# EAGLE board scheme to print (EAGLE 6.4)
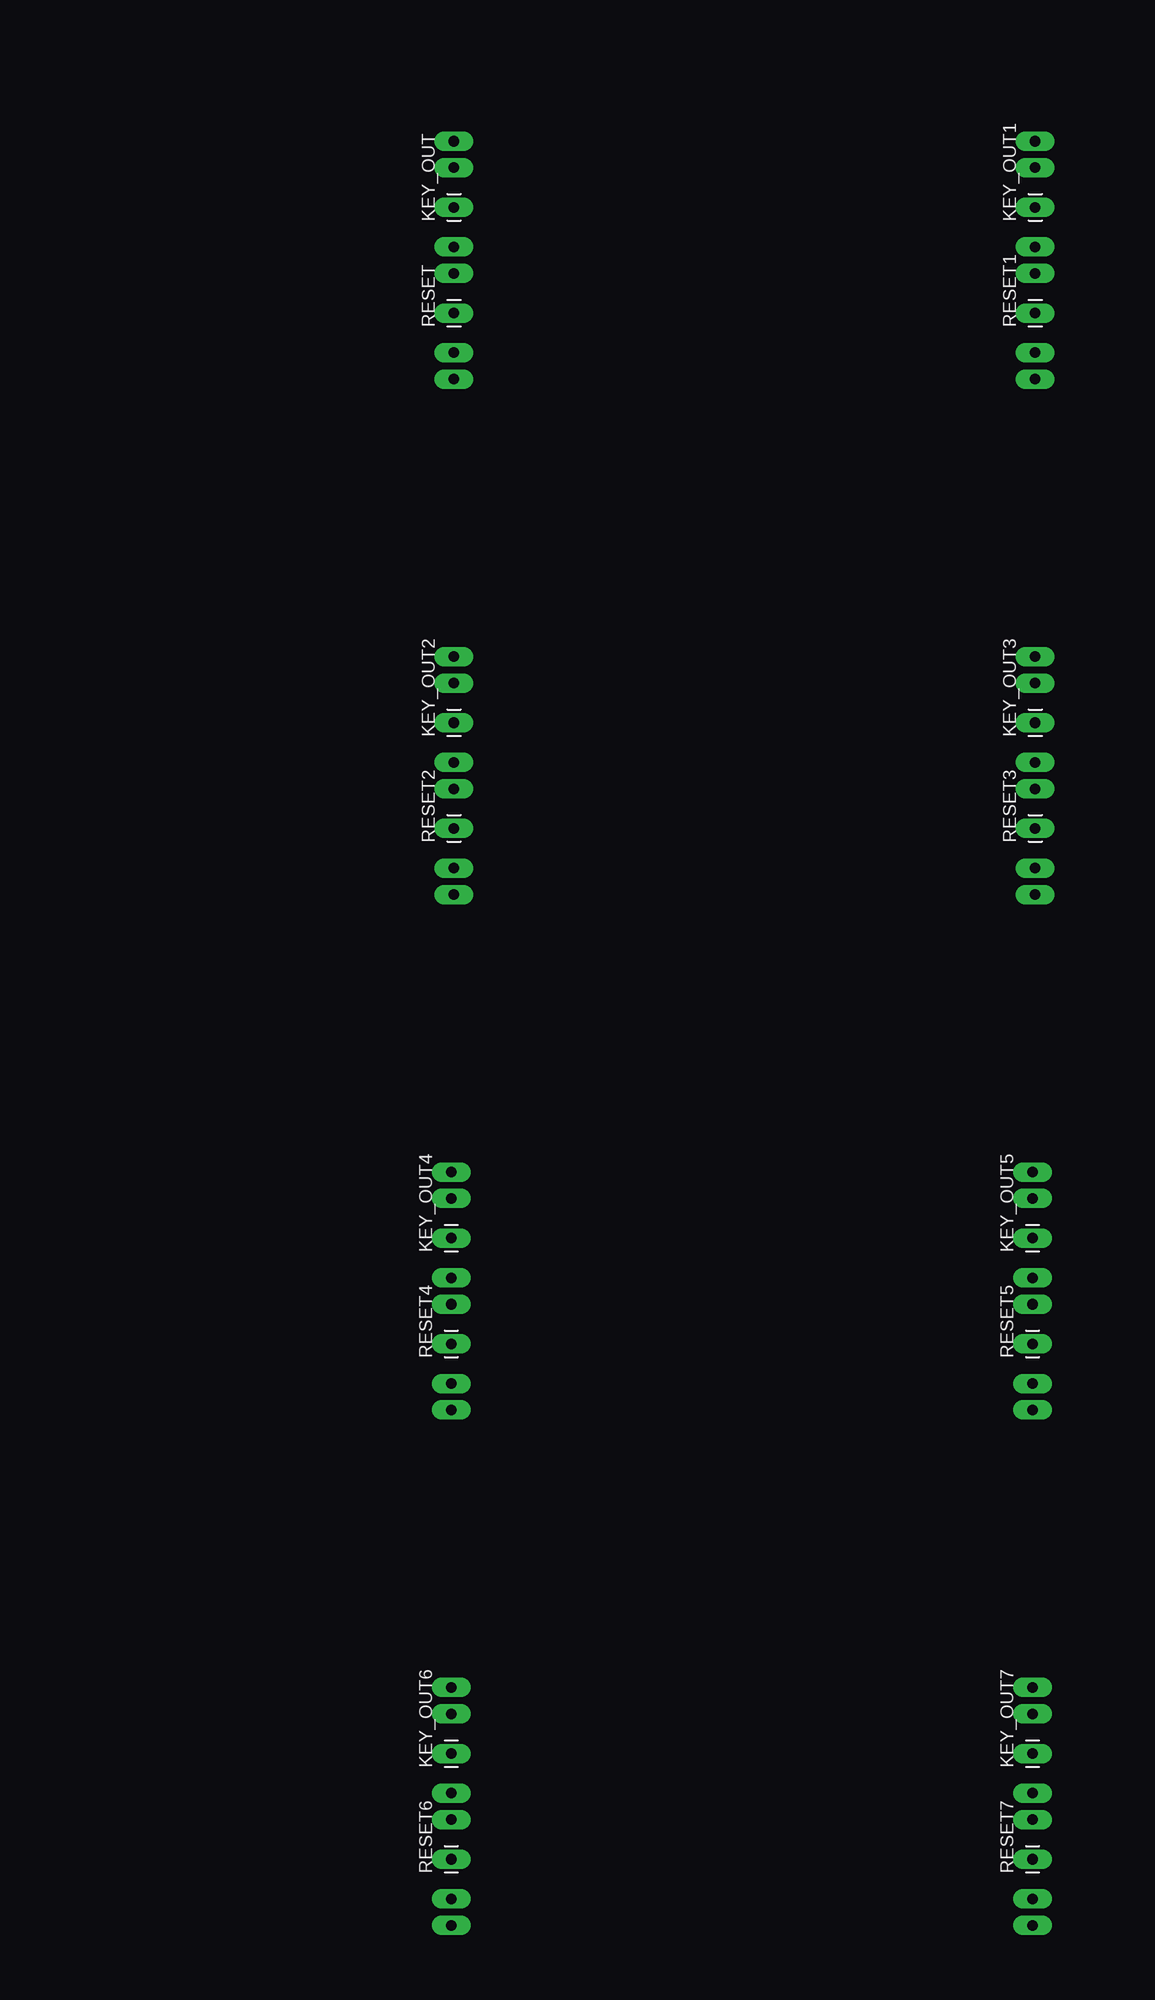
[diagram p0: board, top side]
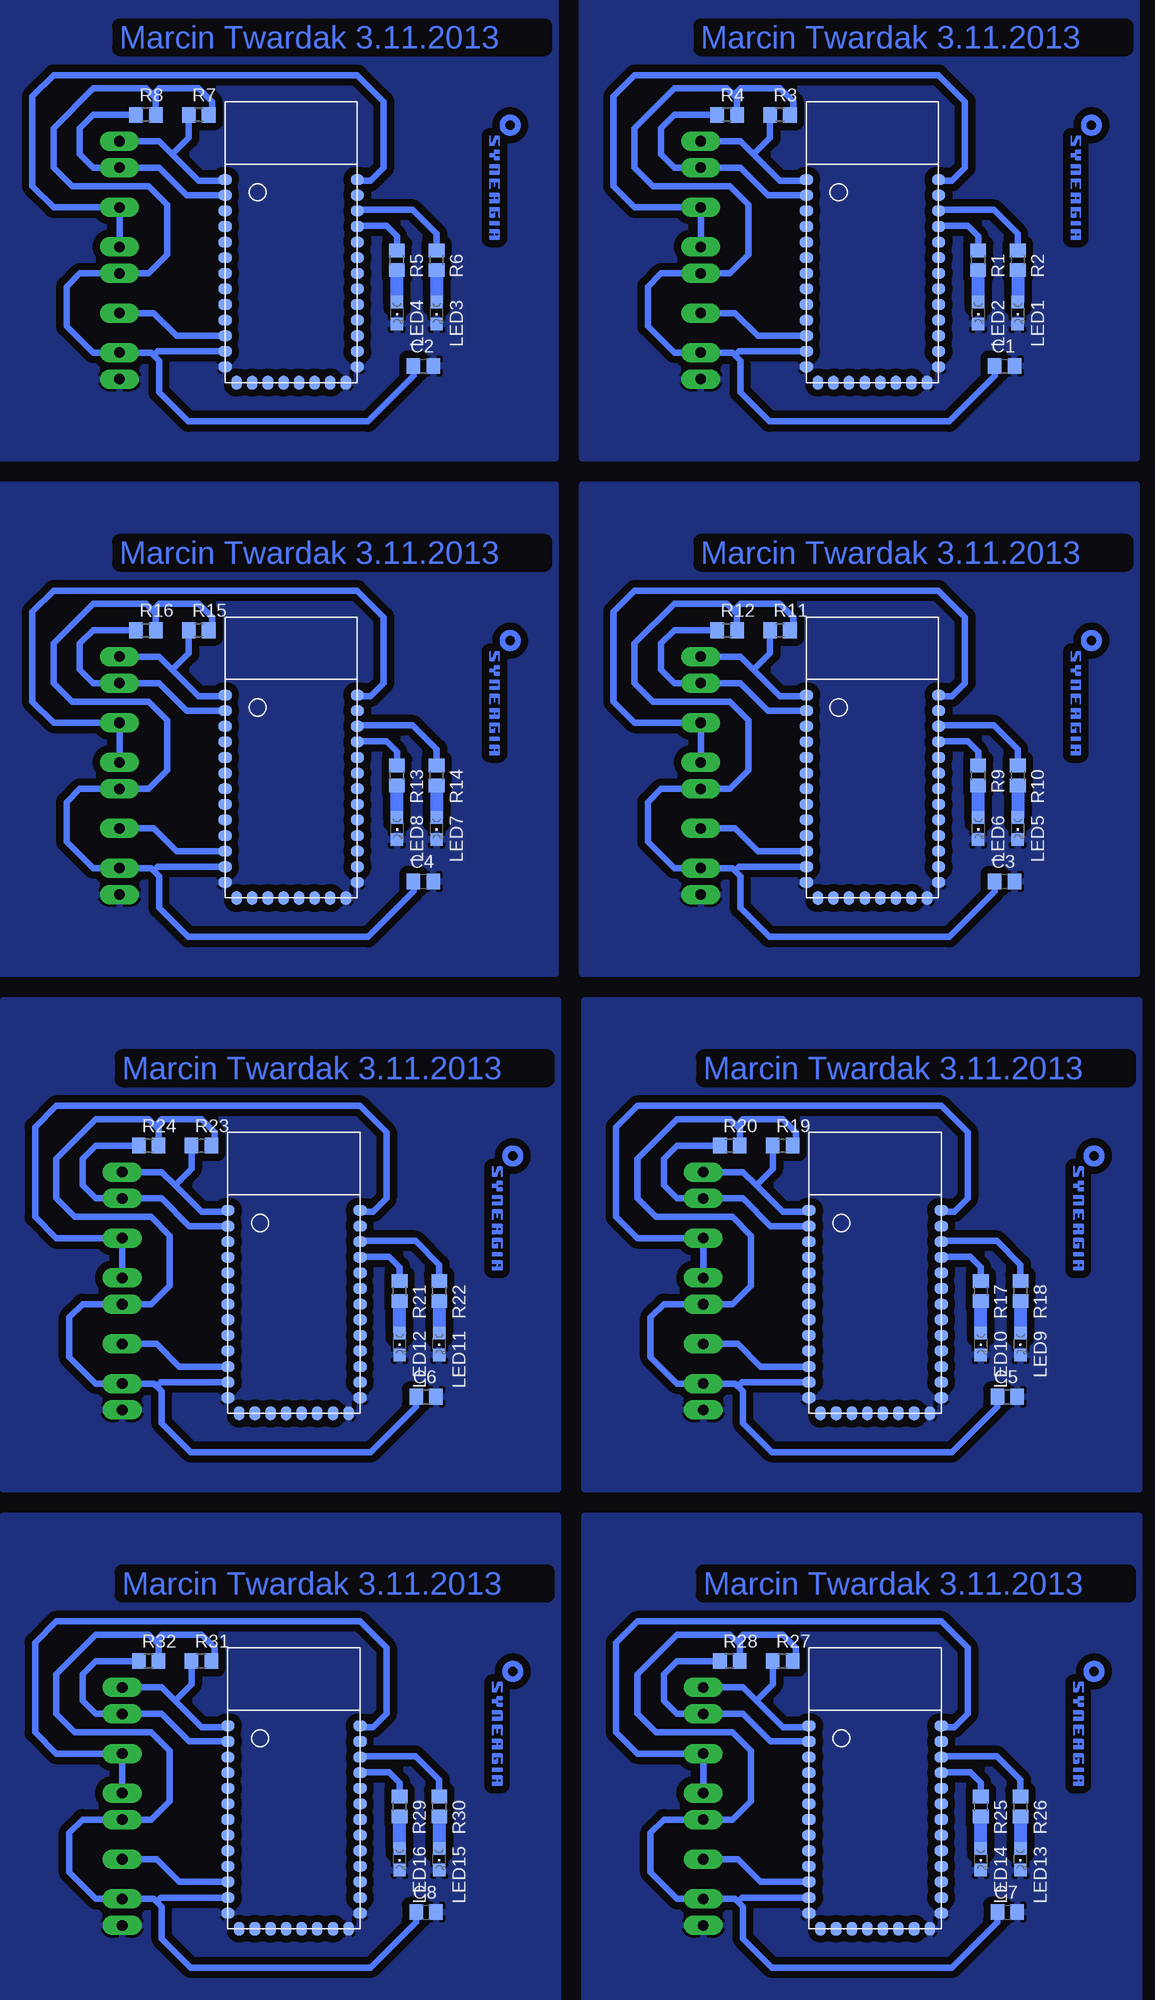
[diagram p1: board, bottom side, seen from below]

No outline drawn. Coordinates in mm, seen from the top.
Copper layers (1*16): Top 0.035mm / dielectric 1.5mm / Bottom 0.035mm
Design rules "default": minimum track width 10mil, minimum drill 24mil, track to track 8mil, track to pad 8mil, pad to pad 8mil, via to via 8mil, smd to smd 8mil, copper to edge 40mil, drill to drill 8mil, minimum pad ring 10mil, minimum via ring 8mil, stop-mask expansion 4mil, vias tented up to drill 0mil, thermal gap 10mil

## Footprints (pad centres in the part's own frame; a part is rotated, then mirrored left to right if it is on the bottom)
C0805 = smd 1.3 x 1.5: 1 -0.95,0; 2 0.95,0
HC-05 = smd 1.27 x 1: 3V3 0,-24; AIO0 0,-19.5; AIO1 0,-21; CTS 0,-10.5; GND@1 0,-25.5; GND@3 12.7,-25.5; PCM_CLK 0,-13.5; PCM_IN 0,-16.5; PCM_OUT 0,-15; PCM_SYNC 0,-18; PIO0 12.7,-24; PIO1 12.7,-22.5; PIO2 12.7,-21; PIO3 12.7,-19.5; PIO4 12.7,-18; PIO5 12.7,-16.5; PIO6 12.7,-15; PIO7 12.7,-13.5; PIO8(LED1) 12.7,-12; PIO9(LED2) 12.7,-10.5; PIO10 12.7,-9; PIO11(KEY) 12.7,-7.5; RESET 0,-22.5; RTS 0,-12; RX 0,-9; TX 0,-7.5 | smd 1 x 1.27: CLK 8.6,-27; CSB 4.1,-27; GND@2 11.6,-27; MISO 7.1,-27; MOSI 5.6,-27; NC 1.1,-27; USB_D+ 10.1,-27; USB_D- 2.6,-27
1X01_LONGPAD = drill 1.016 pad 1.88 long: 1 0,0
1X02_LONGPADS = drill 1.016 pad 1.88 long: 1 0,0; 2 2.54,0
CHIPLED_0805 = smd 1.2 x 1.2: A 0,-1.05; C 0,1.05
R0805 = smd 1.3 x 1.5: 1 -0.95,0; 2 0.95,0

## Placement (x,y rotation side)
C1  100n  [C0805]  12.7,41.91 0 bottom
C2  100n  [C0805]  68.58,41.91 0 bottom
C3  100n  [C0805]  12.7,-7.62 0 bottom
C4  100n  [C0805]  68.58,-7.62 0 bottom
C5  100n  [C0805]  12.45,-57.15 0 bottom
C6  100n  [C0805]  68.33,-57.15 0 bottom
C7  100n  [C0805]  12.45,-106.68 0 bottom
C8  100n  [C0805]  68.33,-106.68 0 bottom
IC1  [HC-05]  31.75,67.31 0 bottom
IC2  [HC-05]  87.63,67.31 0 bottom
IC3  [HC-05]  31.75,17.78 0 bottom
IC4  [HC-05]  87.63,17.78 0 bottom
IC5  [HC-05]  31.5,-31.75 0 bottom
IC6  [HC-05]  87.38,-31.75 0 bottom
IC7  [HC-05]  31.5,-81.28 0 bottom
IC8  [HC-05]  87.38,-81.28 0 bottom
KEY_OUT  M01PTH_LONGPAD  [1X01_LONGPAD]  41.91,57.15 90 top
KEY_OUT1  M01PTH_LONGPAD  [1X01_LONGPAD]  97.79,57.15 90 top
KEY_OUT2  M01PTH_LONGPAD  [1X01_LONGPAD]  41.91,7.62 90 top
KEY_OUT3  M01PTH_LONGPAD  [1X01_LONGPAD]  97.79,7.62 90 top
KEY_OUT4  M01PTH_LONGPAD  [1X01_LONGPAD]  41.66,-41.91 90 top
KEY_OUT5  M01PTH_LONGPAD  [1X01_LONGPAD]  97.54,-41.91 90 top
KEY_OUT6  M01PTH_LONGPAD  [1X01_LONGPAD]  41.66,-91.44 90 top
KEY_OUT7  M01PTH_LONGPAD  [1X01_LONGPAD]  97.54,-91.44 90 top
KEY_ZWORKA  [1X02_LONGPADS]  41.91,50.8 90 top
KEY_ZWORKA1  [1X02_LONGPADS]  97.79,50.8 90 top
KEY_ZWORKA2  [1X02_LONGPADS]  41.91,1.27 90 top
KEY_ZWORKA3  [1X02_LONGPADS]  97.79,1.27 90 top
KEY_ZWORKA4  [1X02_LONGPADS]  41.66,-48.26 90 top
KEY_ZWORKA5  [1X02_LONGPADS]  97.54,-48.26 90 top
KEY_ZWORKA6  [1X02_LONGPADS]  41.66,-97.79 90 top
KEY_ZWORKA7  [1X02_LONGPADS]  97.54,-97.79 90 top
LED1  RED  [CHIPLED_0805]  11.43,46.99 180 bottom
LED2  GREEN  [CHIPLED_0805]  15.24,46.99 180 bottom
LED3  RED  [CHIPLED_0805]  67.31,46.99 180 bottom
LED4  GREEN  [CHIPLED_0805]  71.12,46.99 180 bottom
LED5  RED  [CHIPLED_0805]  11.43,-2.54 180 bottom
LED6  GREEN  [CHIPLED_0805]  15.24,-2.54 180 bottom
LED7  RED  [CHIPLED_0805]  67.31,-2.54 180 bottom
LED8  GREEN  [CHIPLED_0805]  71.12,-2.54 180 bottom
LED9  RED  [CHIPLED_0805]  11.18,-52.07 180 bottom
LED10  GREEN  [CHIPLED_0805]  14.99,-52.07 180 bottom
LED11  RED  [CHIPLED_0805]  67.06,-52.07 180 bottom
LED12  GREEN  [CHIPLED_0805]  70.87,-52.07 180 bottom
LED13  RED  [CHIPLED_0805]  11.18,-101.6 180 bottom
LED14  GREEN  [CHIPLED_0805]  14.99,-101.6 180 bottom
LED15  RED  [CHIPLED_0805]  67.06,-101.6 180 bottom
LED16  GREEN  [CHIPLED_0805]  70.87,-101.6 180 bottom
R1  470  [R0805]  15.24,52.07 270 bottom
R2  470  [R0805]  11.43,52.07 270 bottom
R3  10k  [R0805]  34.29,66.04 0 bottom
R4  10k  [R0805]  39.37,66.04 0 bottom
R5  470  [R0805]  71.12,52.07 270 bottom
R6  470  [R0805]  67.31,52.07 270 bottom
R7  10k  [R0805]  90.17,66.04 0 bottom
R8  10k  [R0805]  95.25,66.04 0 bottom
R9  470  [R0805]  15.24,2.54 270 bottom
R10  470  [R0805]  11.43,2.54 270 bottom
R11  10k  [R0805]  34.29,16.51 0 bottom
R12  10k  [R0805]  39.37,16.51 0 bottom
R13  470  [R0805]  71.12,2.54 270 bottom
R14  470  [R0805]  67.31,2.54 270 bottom
R15  10k  [R0805]  90.17,16.51 0 bottom
R16  10k  [R0805]  95.25,16.51 0 bottom
R17  470  [R0805]  14.99,-46.99 270 bottom
R18  470  [R0805]  11.18,-46.99 270 bottom
R19  10k  [R0805]  34.04,-33.02 0 bottom
R20  10k  [R0805]  39.12,-33.02 0 bottom
R21  470  [R0805]  70.87,-46.99 270 bottom
R22  470  [R0805]  67.06,-46.99 270 bottom
R23  10k  [R0805]  89.92,-33.02 0 bottom
R24  10k  [R0805]  95,-33.02 0 bottom
R25  470  [R0805]  14.99,-96.52 270 bottom
R26  470  [R0805]  11.18,-96.52 270 bottom
R27  10k  [R0805]  34.04,-82.55 0 bottom
R28  10k  [R0805]  39.12,-82.55 0 bottom
R29  470  [R0805]  70.87,-96.52 270 bottom
R30  470  [R0805]  67.06,-96.52 270 bottom
R31  10k  [R0805]  89.92,-82.55 0 bottom
R32  10k  [R0805]  95,-82.55 0 bottom
RESET  M01PTH_LONGPAD  [1X01_LONGPAD]  41.91,46.99 90 top
RESET1  M01PTH_LONGPAD  [1X01_LONGPAD]  97.79,46.99 90 top
RESET2  M01PTH_LONGPAD  [1X01_LONGPAD]  41.91,-2.54 90 top
RESET3  M01PTH_LONGPAD  [1X01_LONGPAD]  97.79,-2.54 90 top
RESET4  M01PTH_LONGPAD  [1X01_LONGPAD]  41.66,-52.07 90 top
RESET5  M01PTH_LONGPAD  [1X01_LONGPAD]  97.54,-52.07 90 top
RESET6  M01PTH_LONGPAD  [1X01_LONGPAD]  41.66,-101.6 90 top
RESET7  M01PTH_LONGPAD  [1X01_LONGPAD]  97.54,-101.6 90 top
RX/TX  [1X02_LONGPADS]  41.91,60.96 90 top
RX/TX1  [1X02_LONGPADS]  97.79,60.96 90 top
RX/TX2  [1X02_LONGPADS]  41.91,11.43 90 top
RX/TX3  [1X02_LONGPADS]  97.79,11.43 90 top
RX/TX4  [1X02_LONGPADS]  41.66,-38.1 90 top
RX/TX5  [1X02_LONGPADS]  97.54,-38.1 90 top
RX/TX6  [1X02_LONGPADS]  41.66,-87.63 90 top
RX/TX7  [1X02_LONGPADS]  97.54,-87.63 90 top
SUPPLY  [1X02_LONGPADS]  41.91,43.18 270 top
SUPPLY1  [1X02_LONGPADS]  97.79,43.18 270 top
SUPPLY2  [1X02_LONGPADS]  41.91,-6.35 270 top
SUPPLY3  [1X02_LONGPADS]  97.79,-6.35 270 top
SUPPLY4  [1X02_LONGPADS]  41.66,-55.88 270 top
SUPPLY5  [1X02_LONGPADS]  97.54,-55.88 270 top
SUPPLY6  [1X02_LONGPADS]  41.66,-105.41 270 top
SUPPLY7  [1X02_LONGPADS]  97.54,-105.41 270 top
U$1  [SYNERGIA_12MM]  6.35,66.04 270 bottom
U$2  [SYNERGIA_12MM]  62.23,66.04 270 bottom
U$3  [SYNERGIA_12MM]  6.35,16.51 270 bottom
U$4  [SYNERGIA_12MM]  62.23,16.51 270 bottom
U$5  [SYNERGIA_12MM]  6.1,-33.02 270 bottom
U$6  [SYNERGIA_12MM]  61.98,-33.02 270 bottom
U$7  [SYNERGIA_12MM]  6.1,-82.55 270 bottom
U$8  [SYNERGIA_12MM]  61.98,-82.55 270 bottom

## Library data of the parts
C1-C8 R1-R32 = rcl
IC1-IC8 = HC-05
KEY_OUT KEY_OUT1-KEY_OUT7 KEY_ZWORKA KEY_ZWORKA1-KEY_ZWORKA7 RESET RESET1-RESET7 RX/TX RX/TX1-RX/TX7 SUPPLY SUPPLY1-SUPPLY7 = SparkFun
LED1-LED16 = led
U$1-U$8 = synergia_logo

## Nets
3.3V: C1.1 IC1.3V3 KEY_ZWORKA.1 R3.2 R4.2 SUPPLY.1
3.3V1: C2.1 IC2.3V3 KEY_ZWORKA1.1 R7.2 R8.2 SUPPLY1.1
3.3V2: C3.1 IC3.3V3 KEY_ZWORKA2.1 R11.2 R12.2 SUPPLY2.1
3.3V3: C4.1 IC4.3V3 KEY_ZWORKA3.1 R15.2 R16.2 SUPPLY3.1
3.3V4: C5.1 IC5.3V3 KEY_ZWORKA4.1 R19.2 R20.2 SUPPLY4.1
3.3V5: C6.1 IC6.3V3 KEY_ZWORKA5.1 R23.2 R24.2 SUPPLY5.1
3.3V6: C7.1 IC7.3V3 KEY_ZWORKA6.1 R27.2 R28.2 SUPPLY6.1
3.3V7: C8.1 IC8.3V3 KEY_ZWORKA7.1 R31.2 R32.2 SUPPLY7.1
GND: C1.2 IC1.GND@1 IC1.GND@2 IC1.GND@3 LED1.C LED2.C SUPPLY.2
GND1: C2.2 IC2.GND@1 IC2.GND@2 IC2.GND@3 LED3.C LED4.C SUPPLY1.2
GND2: C3.2 IC3.GND@1 IC3.GND@2 IC3.GND@3 LED5.C LED6.C SUPPLY2.2
GND3: C4.2 IC4.GND@1 IC4.GND@2 IC4.GND@3 LED7.C LED8.C SUPPLY3.2
GND4: C5.2 IC5.GND@1 IC5.GND@2 IC5.GND@3 LED9.C LED10.C SUPPLY4.2
GND5: C6.2 IC6.GND@1 IC6.GND@2 IC6.GND@3 LED11.C LED12.C SUPPLY5.2
GND6: C7.2 IC7.GND@1 IC7.GND@2 IC7.GND@3 LED13.C LED14.C SUPPLY6.2
GND7: C8.2 IC8.GND@1 IC8.GND@2 IC8.GND@3 LED15.C LED16.C SUPPLY7.2
N$1: IC1.PIO11(KEY) KEY_OUT.1 KEY_ZWORKA.2
N$2: IC1.PIO8(LED1) R1.1
N$3: IC1.PIO9(LED2) R2.1
N$4: LED2.A R1.2
N$5: LED1.A R2.2
N$6: IC1.RESET RESET.1
N$7: IC1.TX R3.1 RX/TX.2
N$8: IC1.RX R4.1 RX/TX.1
N$9: IC2.PIO11(KEY) KEY_OUT1.1 KEY_ZWORKA1.2
N$10: IC2.PIO8(LED1) R5.1
N$11: IC2.PIO9(LED2) R6.1
N$12: LED3.A R6.2
N$13: LED4.A R5.2
N$14: IC2.TX R7.1 RX/TX1.2
N$15: IC2.RX R8.1 RX/TX1.1
N$16: IC2.RESET RESET1.1
N$17: IC3.PIO11(KEY) KEY_OUT2.1 KEY_ZWORKA2.2
N$18: IC3.PIO8(LED1) R9.1
N$19: IC3.PIO9(LED2) R10.1
N$20: LED5.A R10.2
N$21: LED6.A R9.2
N$22: IC3.TX R11.1 RX/TX2.2
N$23: IC3.RX R12.1 RX/TX2.1
N$24: IC3.RESET RESET2.1
N$25: IC4.PIO11(KEY) KEY_OUT3.1 KEY_ZWORKA3.2
N$26: IC4.PIO8(LED1) R13.1
N$27: IC4.PIO9(LED2) R14.1
N$28: LED7.A R14.2
N$29: LED8.A R13.2
N$30: IC4.TX R15.1 RX/TX3.2
N$31: IC4.RX R16.1 RX/TX3.1
N$32: IC4.RESET RESET3.1
N$33: IC5.PIO11(KEY) KEY_OUT4.1 KEY_ZWORKA4.2
N$34: IC5.PIO8(LED1) R17.1
N$35: IC5.PIO9(LED2) R18.1
N$36: LED9.A R18.2
N$37: LED10.A R17.2
N$38: IC5.TX R19.1 RX/TX4.2
N$39: IC5.RX R20.1 RX/TX4.1
N$40: IC5.RESET RESET4.1
N$41: IC6.PIO11(KEY) KEY_OUT5.1 KEY_ZWORKA5.2
N$42: IC6.PIO8(LED1) R21.1
N$43: IC6.PIO9(LED2) R22.1
N$44: LED11.A R22.2
N$45: LED12.A R21.2
N$46: IC6.TX R23.1 RX/TX5.2
N$47: IC6.RX R24.1 RX/TX5.1
N$48: IC6.RESET RESET5.1
N$49: IC7.PIO11(KEY) KEY_OUT6.1 KEY_ZWORKA6.2
N$50: IC7.PIO8(LED1) R25.1
N$51: IC7.PIO9(LED2) R26.1
N$52: LED13.A R26.2
N$53: LED14.A R25.2
N$54: IC7.TX R27.1 RX/TX6.2
N$55: IC7.RX R28.1 RX/TX6.1
N$56: IC7.RESET RESET6.1
N$57: IC8.PIO11(KEY) KEY_OUT7.1 KEY_ZWORKA7.2
N$58: IC8.PIO8(LED1) R29.1
N$59: IC8.PIO9(LED2) R30.1
N$60: LED15.A R30.2
N$61: LED16.A R29.2
N$62: IC8.TX R31.1 RX/TX7.2
N$63: IC8.RX R32.1 RX/TX7.1
N$64: IC8.RESET RESET7.1

## Tracks (layer width: path | path; a pad name or v marks a point on that pad's centre or on a via)
3.3V
  Bottom 0.61: C1.1 13.65,40.96 18.03,36.58 35.31,36.58 38.1,39.37 38.1,42.42 38.61,42.93 | 38.61,42.93 38.86,43.18 SUPPLY.1 44.45,43.18 46.99,45.72 46.99,49.53 45.72,50.8 KEY_ZWORKA.1 39.12,50.8 37.34,52.58 37.34,57.4 39.12,59.18 46.48,59.18 48.26,60.96 48.26,64.77 44.45,68.58 39.37,68.58 38.42,67.63 | IC1.3V3 38.22,43.31 38.61,42.93 | R3.2 33.02,66.36 33.02,67.31 34.29,68.58 38.1,68.58 38.42,68.26 38.42,67.63 | R4.2 38.42,67.63
3.3V1
  Bottom 0.61: C2.1 69.53,40.96 73.91,36.58 91.19,36.58 93.98,39.37 93.98,42.42 94.49,42.93 | 94.49,42.93 94.74,43.18 SUPPLY1.1 100.33,43.18 102.87,45.72 102.87,49.53 101.6,50.8 KEY_ZWORKA1.1 95,50.8 93.22,52.58 93.22,57.4 95,59.18 102.36,59.18 104.14,60.96 104.14,64.77 100.33,68.58 95.25,68.58 94.3,67.63 | IC2.3V3 94.1,43.31 94.49,42.93 | R7.2 88.9,66.36 88.9,67.31 90.17,68.58 93.98,68.58 94.3,68.26 94.3,67.63 | R8.2 94.3,67.63
3.3V2
  Bottom 0.61: C3.1 13.65,-8.57 18.03,-12.95 35.31,-12.95 38.1,-10.16 38.1,-7.11 38.61,-6.6 | 38.61,-6.6 38.86,-6.35 SUPPLY2.1 44.45,-6.35 46.99,-3.81 46.99,0 45.72,1.27 KEY_ZWORKA2.1 39.12,1.27 37.34,3.05 37.34,7.87 39.12,9.65 46.48,9.65 48.26,11.43 48.26,15.24 44.45,19.05 39.37,19.05 38.42,18.1 | IC3.3V3 38.22,-6.22 38.61,-6.6 | R11.2 33.02,16.83 33.02,17.78 34.29,19.05 38.1,19.05 38.42,18.73 38.42,18.1 | R12.2 38.42,18.1
3.3V3
  Bottom 0.61: C4.1 69.53,-8.57 73.91,-12.95 91.19,-12.95 93.98,-10.16 93.98,-7.11 94.49,-6.6 | 94.49,-6.6 94.74,-6.35 SUPPLY3.1 100.33,-6.35 102.87,-3.81 102.87,0 101.6,1.27 KEY_ZWORKA3.1 95,1.27 93.22,3.05 93.22,7.87 95,9.65 102.36,9.65 104.14,11.43 104.14,15.24 100.33,19.05 95.25,19.05 94.3,18.1 | IC4.3V3 94.1,-6.22 94.49,-6.6 | R15.2 88.9,16.83 88.9,17.78 90.17,19.05 93.98,19.05 94.3,18.73 94.3,18.1 | R16.2 94.3,18.1
3.3V4
  Bottom 0.61: C5.1 13.4,-58.1 17.78,-62.48 35.05,-62.48 37.85,-59.69 37.85,-56.64 38.35,-56.13 | 38.35,-56.13 38.61,-55.88 SUPPLY4.1 44.2,-55.88 46.74,-53.34 46.74,-49.53 45.47,-48.26 KEY_ZWORKA4.1 38.86,-48.26 37.08,-46.48 37.08,-41.66 38.86,-39.88 46.23,-39.88 48.01,-38.1 48.01,-34.29 44.2,-30.48 39.12,-30.48 38.17,-31.43 | IC5.3V3 37.97,-55.75 38.35,-56.13 | R19.2 32.77,-32.7 32.77,-31.75 34.04,-30.48 37.85,-30.48 38.17,-30.8 38.17,-31.43 | R20.2 38.17,-31.43
3.3V5
  Bottom 0.61: C6.1 69.28,-58.1 73.66,-62.48 90.93,-62.48 93.73,-59.69 93.73,-56.64 94.23,-56.13 | 94.23,-56.13 94.49,-55.88 SUPPLY5.1 100.08,-55.88 102.62,-53.34 102.62,-49.53 101.35,-48.26 KEY_ZWORKA5.1 94.74,-48.26 92.96,-46.48 92.96,-41.66 94.74,-39.88 102.11,-39.88 103.89,-38.1 103.89,-34.29 100.08,-30.48 95,-30.48 94.05,-31.43 | IC6.3V3 93.85,-55.75 94.23,-56.13 | R23.2 88.65,-32.7 88.65,-31.75 89.92,-30.48 93.73,-30.48 94.05,-30.8 94.05,-31.43 | R24.2 94.05,-31.43
3.3V6
  Bottom 0.61: C7.1 13.4,-107.63 17.78,-112.01 35.05,-112.01 37.85,-109.22 37.85,-106.17 38.35,-105.66 | 38.35,-105.66 38.61,-105.41 SUPPLY6.1 44.2,-105.41 46.74,-102.87 46.74,-99.06 45.47,-97.79 KEY_ZWORKA6.1 38.86,-97.79 37.08,-96.01 37.08,-91.19 38.86,-89.41 46.23,-89.41 48.01,-87.63 48.01,-83.82 44.2,-80.01 39.12,-80.01 38.17,-80.96 | IC7.3V3 37.97,-105.28 38.35,-105.66 | R27.2 32.77,-82.23 32.77,-81.28 34.04,-80.01 37.85,-80.01 38.17,-80.33 38.17,-80.96 | R28.2 38.17,-80.96
3.3V7
  Bottom 0.61: C8.1 69.28,-107.63 73.66,-112.01 90.93,-112.01 93.73,-109.22 93.73,-106.17 94.23,-105.66 | 94.23,-105.66 94.49,-105.41 SUPPLY7.1 100.08,-105.41 102.62,-102.87 102.62,-99.06 101.35,-97.79 KEY_ZWORKA7.1 94.74,-97.79 92.96,-96.01 92.96,-91.19 94.74,-89.41 102.11,-89.41 103.89,-87.63 103.89,-83.82 100.08,-80.01 95,-80.01 94.05,-80.96 | IC8.3V3 93.85,-105.28 94.23,-105.66 | R31.2 88.65,-82.23 88.65,-81.28 89.92,-80.01 93.73,-80.01 94.05,-80.33 94.05,-80.96 | R32.2 94.05,-80.96
GND
  pour Bottom (isolate 0.711): 0,80.01 0,33.02 53.34,33.02 53.34,80.01
GND1
  pour Bottom (isolate 0.711): 55.88,80.01 55.88,33.02 109.22,33.02 109.22,80.01
GND2
  pour Bottom (isolate 0.711): 0,30.48 0,-16.51 53.34,-16.51 53.34,30.48
GND3
  pour Bottom (isolate 0.711): 55.88,30.48 55.88,-16.51 109.22,-16.51 109.22,30.48
GND4
  pour Bottom (isolate 0.711): -0.25,-19.05 -0.25,-66.04 53.09,-66.04 53.09,-19.05
GND5
  pour Bottom (isolate 0.711): 55.63,-19.05 55.63,-66.04 108.97,-66.04 108.97,-19.05
GND6
  pour Bottom (isolate 0.711): -0.25,-68.58 -0.25,-115.57 53.09,-115.57 53.09,-68.58
GND7
  pour Bottom (isolate 0.711): 55.63,-68.58 55.63,-115.57 108.97,-115.57 108.97,-68.58
N$1
  Bottom 0.61: KEY_ZWORKA.2 KEY_OUT.1 48.26,57.15 50.29,59.18 50.29,67.82 48.26,69.85 19.05,69.85 16.51,67.31 16.51,60.96 17.78,59.69 18.93,59.69 IC1.PIO11(KEY)
N$2
  Bottom 0.61: R1.1 15.24,54.36 16.26,55.37 18.99,55.37 IC1.PIO8(LED1)
N$3
  Bottom 0.61: R2.1 11.43,54.61 13.72,56.9 18.96,56.9 IC1.PIO9(LED2)
N$4
  Bottom 1.27: LED2.A R1.2
N$5
  Bottom 1.27: R2.2 LED1.A
N$6
  Bottom 0.61: IC1.RESET 36.43,44.81 38.61,46.99 RESET.1
N$7
  Bottom 0.61: IC1.TX 31.87,59.69 34.29,59.69 36.83,62.23 | 36.83,62.23 38.1,63.5 RX/TX.2 | R3.1 35.24,63.82 36.83,62.23
N$8
  Bottom 0.61: IC1.RX 35.45,58.31 38.1,60.96 RX/TX.1 44.45,60.96 45.72,62.23 45.72,64.77 44.45,66.04 R4.1
N$9
  Bottom 0.61: KEY_ZWORKA1.2 KEY_OUT1.1 104.14,57.15 106.17,59.18 106.17,67.82 104.14,69.85 74.93,69.85 72.39,67.31 72.39,60.96 73.66,59.69 74.81,59.69 IC2.PIO11(KEY)
N$10
  Bottom 0.61: R5.1 71.12,54.36 72.14,55.37 74.87,55.37 IC2.PIO8(LED1)
N$11
  Bottom 0.61: R6.1 67.31,54.61 69.6,56.9 74.84,56.9 IC2.PIO9(LED2)
N$12
  Bottom 1.27: R6.2 LED3.A
N$13
  Bottom 1.27: LED4.A R5.2
N$14
  Bottom 0.61: IC2.TX 87.75,59.69 90.17,59.69 92.71,62.23 | 92.71,62.23 93.98,63.5 RX/TX1.2 | R7.1 91.12,63.82 92.71,62.23
N$15
  Bottom 0.61: IC2.RX 91.33,58.31 93.98,60.96 RX/TX1.1 100.33,60.96 101.6,62.23 101.6,64.77 100.33,66.04 R8.1
N$16
  Bottom 0.61: IC2.RESET 92.31,44.81 94.49,46.99 RESET1.1
N$17
  Bottom 0.61: KEY_ZWORKA2.2 KEY_OUT2.1 48.26,7.62 50.29,9.65 50.29,18.29 48.26,20.32 19.05,20.32 16.51,17.78 16.51,11.43 17.78,10.16 18.93,10.16 IC3.PIO11(KEY)
N$18
  Bottom 0.61: R9.1 15.24,4.83 16.26,5.84 18.99,5.84 IC3.PIO8(LED1)
N$19
  Bottom 0.61: R10.1 11.43,5.08 13.72,7.37 18.96,7.37 IC3.PIO9(LED2)
N$20
  Bottom 1.27: R10.2 LED5.A
N$21
  Bottom 1.27: LED6.A R9.2
N$22
  Bottom 0.61: IC3.TX 31.87,10.16 34.29,10.16 36.83,12.7 | 36.83,12.7 38.1,13.97 RX/TX2.2 | R11.1 35.24,14.29 36.83,12.7
N$23
  Bottom 0.61: IC3.RX 35.45,8.78 38.1,11.43 RX/TX2.1 44.45,11.43 45.72,12.7 45.72,15.24 44.45,16.51 R12.1
N$24
  Bottom 0.61: IC3.RESET 36.43,-4.72 38.61,-2.54 RESET2.1
N$25
  Bottom 0.61: KEY_ZWORKA3.2 KEY_OUT3.1 104.14,7.62 106.17,9.65 106.17,18.29 104.14,20.32 74.93,20.32 72.39,17.78 72.39,11.43 73.66,10.16 74.81,10.16 IC4.PIO11(KEY)
N$26
  Bottom 0.61: R13.1 71.12,4.83 72.14,5.84 74.87,5.84 IC4.PIO8(LED1)
N$27
  Bottom 0.61: R14.1 67.31,5.08 69.6,7.37 74.84,7.37 IC4.PIO9(LED2)
N$28
  Bottom 1.27: R14.2 LED7.A
N$29
  Bottom 1.27: LED8.A R13.2
N$30
  Bottom 0.61: IC4.TX 87.75,10.16 90.17,10.16 92.71,12.7 | 92.71,12.7 93.98,13.97 RX/TX3.2 | R15.1 91.12,14.29 92.71,12.7
N$31
  Bottom 0.61: IC4.RX 91.33,8.78 93.98,11.43 RX/TX3.1 100.33,11.43 101.6,12.7 101.6,15.24 100.33,16.51 R16.1
N$32
  Bottom 0.61: IC4.RESET 92.31,-4.72 94.49,-2.54 RESET3.1
N$33
  Bottom 0.61: KEY_ZWORKA4.2 KEY_OUT4.1 48.01,-41.91 50.04,-39.88 50.04,-31.24 48.01,-29.21 18.8,-29.21 16.26,-31.75 16.26,-38.1 17.53,-39.37 18.68,-39.37 IC5.PIO11(KEY)
N$34
  Bottom 0.61: R17.1 14.99,-44.7 16,-43.69 18.73,-43.69 IC5.PIO8(LED1)
N$35
  Bottom 0.61: R18.1 11.18,-44.45 13.46,-42.16 18.71,-42.16 IC5.PIO9(LED2)
N$36
  Bottom 1.27: R18.2 LED9.A
N$37
  Bottom 1.27: LED10.A R17.2
N$38
  Bottom 0.61: IC5.TX 31.62,-39.37 34.04,-39.37 36.58,-36.83 | 36.58,-36.83 37.85,-35.56 RX/TX4.2 | R19.1 34.99,-35.24 36.58,-36.83
N$39
  Bottom 0.61: IC5.RX 35.2,-40.75 37.85,-38.1 RX/TX4.1 44.2,-38.1 45.47,-36.83 45.47,-34.29 44.2,-33.02 R20.1
N$40
  Bottom 0.61: IC5.RESET 36.17,-54.25 38.35,-52.07 RESET4.1
N$41
  Bottom 0.61: KEY_ZWORKA5.2 KEY_OUT5.1 103.89,-41.91 105.92,-39.88 105.92,-31.24 103.89,-29.21 74.68,-29.21 72.14,-31.75 72.14,-38.1 73.41,-39.37 74.56,-39.37 IC6.PIO11(KEY)
N$42
  Bottom 0.61: R21.1 70.87,-44.7 71.88,-43.69 74.61,-43.69 IC6.PIO8(LED1)
N$43
  Bottom 0.61: R22.1 67.06,-44.45 69.34,-42.16 74.59,-42.16 IC6.PIO9(LED2)
N$44
  Bottom 1.27: R22.2 LED11.A
N$45
  Bottom 1.27: LED12.A R21.2
N$46
  Bottom 0.61: IC6.TX 87.5,-39.37 89.92,-39.37 92.46,-36.83 | 92.46,-36.83 93.73,-35.56 RX/TX5.2 | R23.1 90.87,-35.24 92.46,-36.83
N$47
  Bottom 0.61: IC6.RX 91.08,-40.75 93.73,-38.1 RX/TX5.1 100.08,-38.1 101.35,-36.83 101.35,-34.29 100.08,-33.02 R24.1
N$48
  Bottom 0.61: IC6.RESET 92.05,-54.25 94.23,-52.07 RESET5.1
N$49
  Bottom 0.61: KEY_ZWORKA6.2 KEY_OUT6.1 48.01,-91.44 50.04,-89.41 50.04,-80.77 48.01,-78.74 18.8,-78.74 16.26,-81.28 16.26,-87.63 17.53,-88.9 18.68,-88.9 IC7.PIO11(KEY)
N$50
  Bottom 0.61: R25.1 14.99,-94.23 16,-93.22 18.73,-93.22 IC7.PIO8(LED1)
N$51
  Bottom 0.61: R26.1 11.18,-93.98 13.46,-91.69 18.71,-91.69 IC7.PIO9(LED2)
N$52
  Bottom 1.27: R26.2 LED13.A
N$53
  Bottom 1.27: LED14.A R25.2
N$54
  Bottom 0.61: IC7.TX 31.62,-88.9 34.04,-88.9 36.58,-86.36 | 36.58,-86.36 37.85,-85.09 RX/TX6.2 | R27.1 34.99,-84.77 36.58,-86.36
N$55
  Bottom 0.61: IC7.RX 35.2,-90.28 37.85,-87.63 RX/TX6.1 44.2,-87.63 45.47,-86.36 45.47,-83.82 44.2,-82.55 R28.1
N$56
  Bottom 0.61: IC7.RESET 36.17,-103.78 38.35,-101.6 RESET6.1
N$57
  Bottom 0.61: KEY_ZWORKA7.2 KEY_OUT7.1 103.89,-91.44 105.92,-89.41 105.92,-80.77 103.89,-78.74 74.68,-78.74 72.14,-81.28 72.14,-87.63 73.41,-88.9 74.56,-88.9 IC8.PIO11(KEY)
N$58
  Bottom 0.61: R29.1 70.87,-94.23 71.88,-93.22 74.61,-93.22 IC8.PIO8(LED1)
N$59
  Bottom 0.61: R30.1 67.06,-93.98 69.34,-91.69 74.59,-91.69 IC8.PIO9(LED2)
N$60
  Bottom 1.27: R30.2 LED15.A
N$61
  Bottom 1.27: LED16.A R29.2
N$62
  Bottom 0.61: IC8.TX 87.5,-88.9 89.92,-88.9 92.46,-86.36 | 92.46,-86.36 93.73,-85.09 RX/TX7.2 | R31.1 90.87,-84.77 92.46,-86.36
N$63
  Bottom 0.61: IC8.RX 91.08,-90.28 93.73,-87.63 RX/TX7.1 100.08,-87.63 101.35,-86.36 101.35,-83.82 100.08,-82.55 R32.1
N$64
  Bottom 0.61: IC8.RESET 92.05,-103.78 94.23,-101.6 RESET7.1

## Text on the board
Bottom: Marcin Twardak 3.11.2013 | Marcin Twardak 3.11.2013 | Marcin Twardak 3.11.2013 | Marcin Twardak 3.11.2013 | Marcin Twardak 3.11.2013 | Marcin Twardak 3.11.2013 | Marcin Twardak 3.11.2013 | Marcin Twardak 3.11.2013